# Altium PCB SIPM_small.pcbdoc
Units mm, origin at the board's own origin, x right, y up, seen from the top; angles counter-clockwise.
Board outline 44.07 x 56.52 mm, 2 copper layers (Top Layer, Bottom Layer); 5 components, 8 nets, 31 pads, 4 vias.
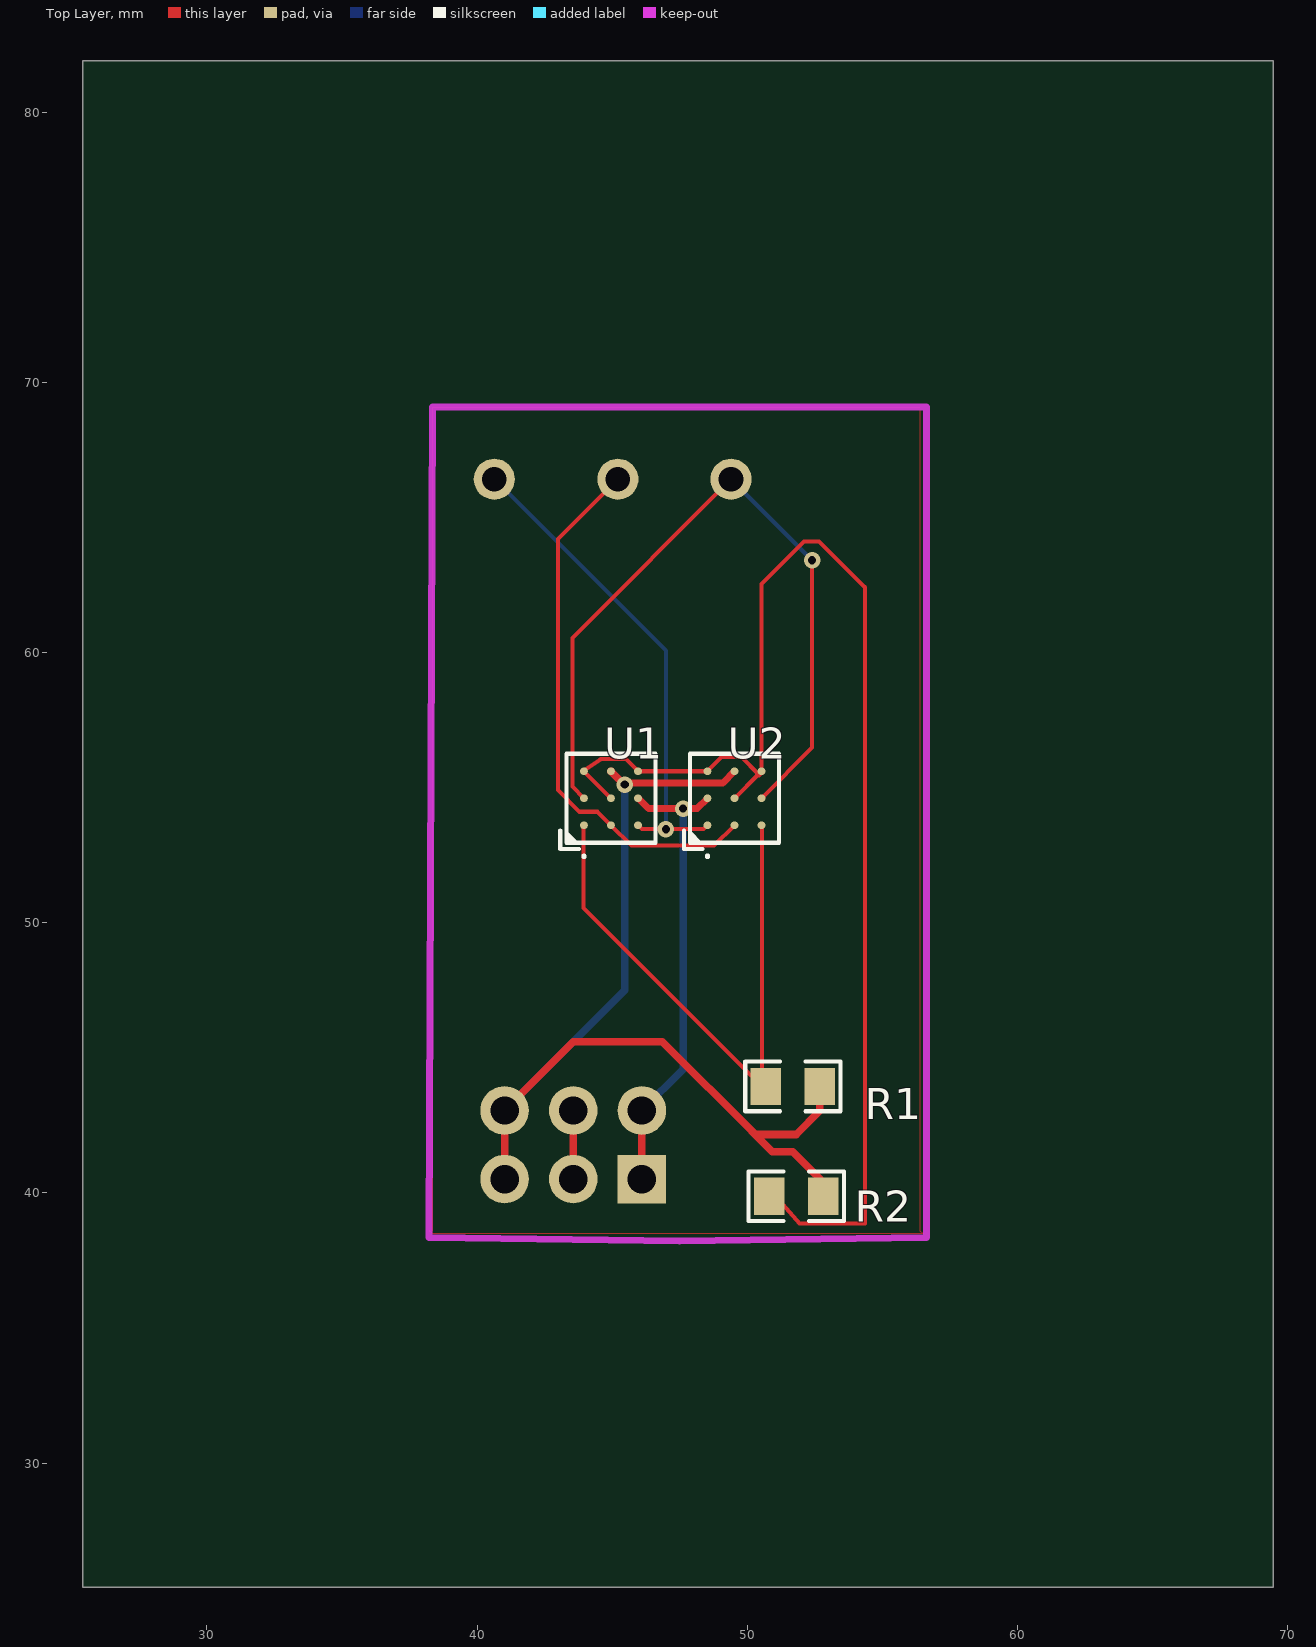
[diagram p0: Top Layer view]
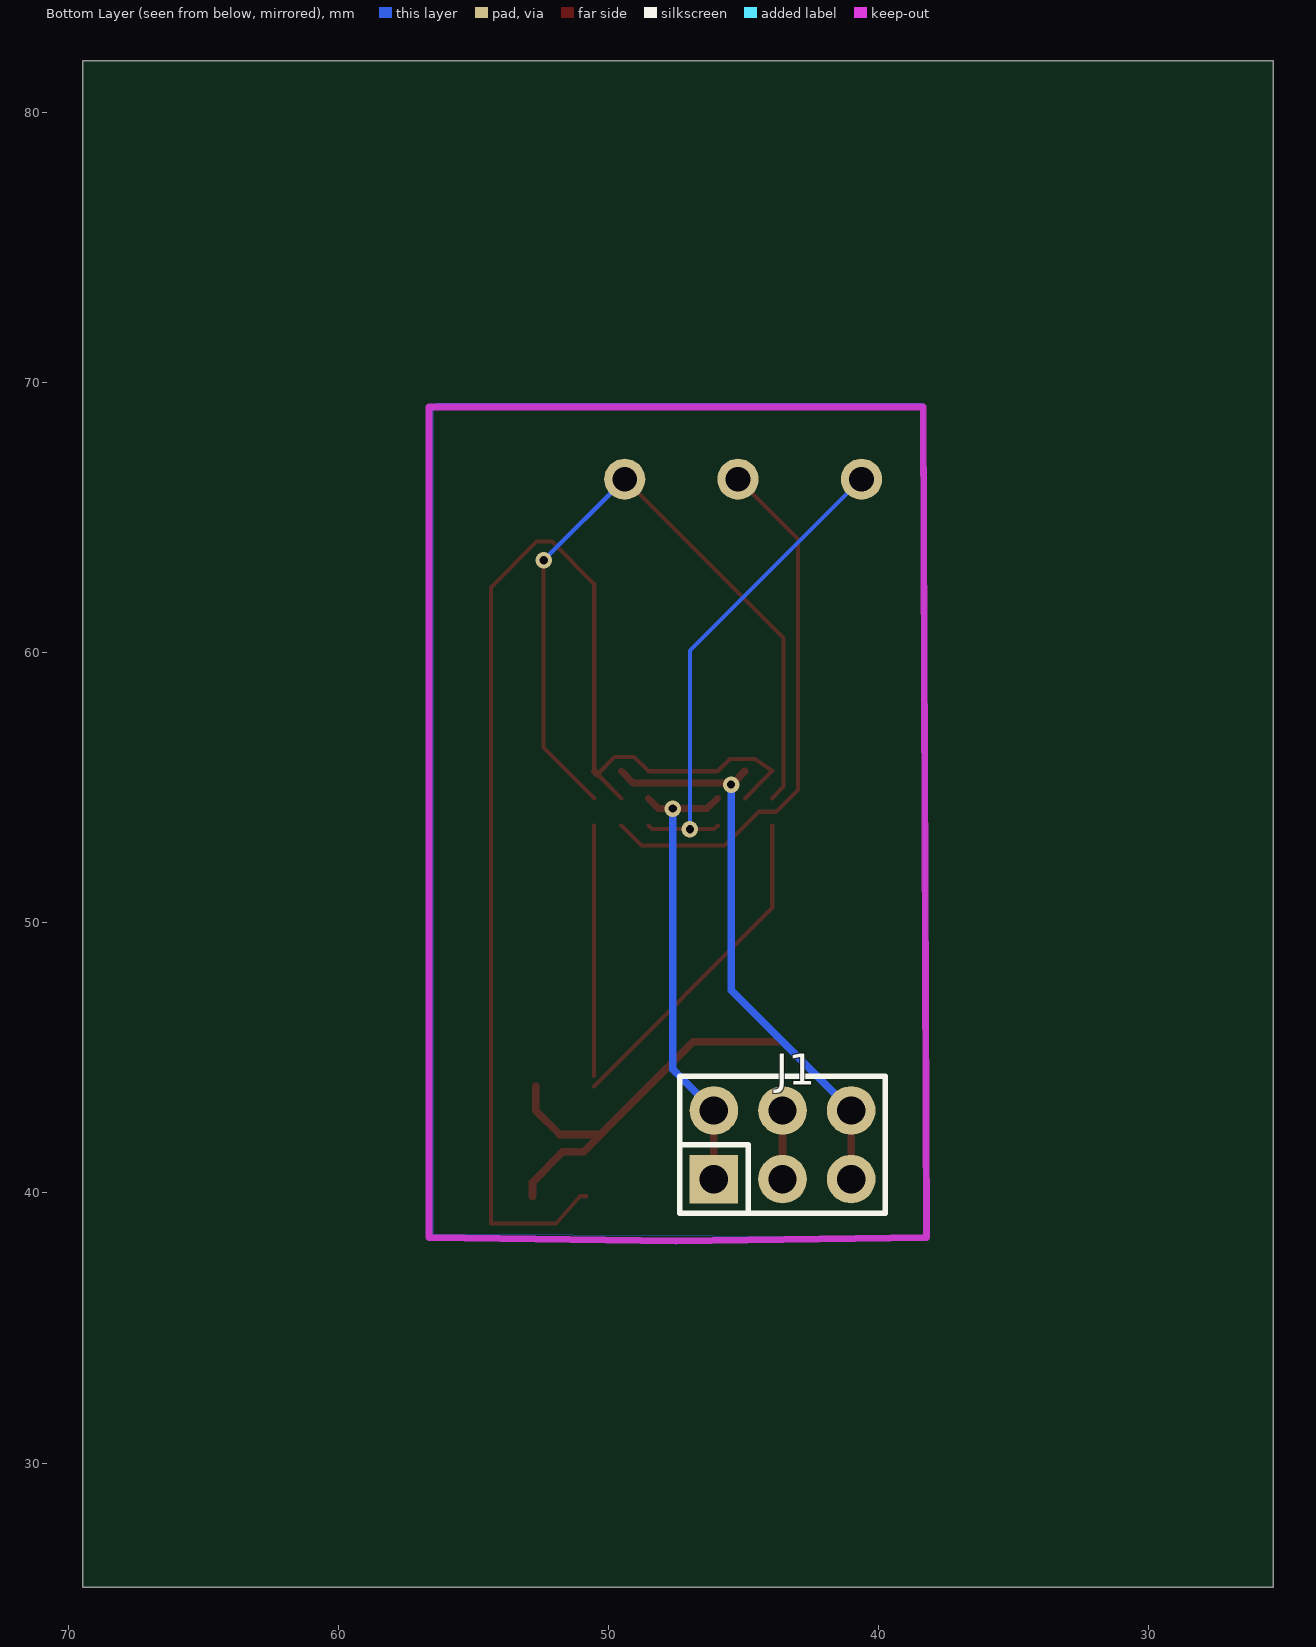
[diagram p1: Bottom Layer view, seen from below]

## Layer stack, top to bottom
Top Layer: signal copper (thickness not stored)
Dielectric: dielectric 0.32, FR-4, Dk 4.8
Bottom Layer: signal copper (thickness not stored)

## Board outline
69.469,25.4 25.4,25.4 25.4,81.915 69.469,81.915

## Components (designator, comment, footprint, x,y, rotation, side; value= is the part's Value field where it differs from the comment)
J1 "Header-Male-2.54_2x3" HDR-TH_6P-P2.54-V-M-R2-C3-S2.54-1 43.561,41.783 r0 bottom
R1 "0Ω" R0805 51.689,43.942 r0 top
R2 "0Ω" R0805 51.816,39.878 r0 top
U1 "NO" SIPM_ORI 44.958,54.61 r0 top
U2 "Sipm2" SIPM_REVERSE 49.53,54.61 r0 top

## Footprints (in the part's own frame and the unit in brackets; to place one, negate y for a bottom-side part, rotate by r counter-clockwise, add the part's x,y. Pads: shape width x height; smd on the part's side, far side on the other; paste and mask are expansions set on the pad)
HDR-TH_6P-P2.54-V-M-R2-C3-S2.54-1 [mm]
  rect 1.8x1.8 hole 1.05 paste+0 mask+0.051: 1(2.54,1.27)
  round 1.8 hole 1.05 paste+0 mask+0.051: 2(2.54,-1.27) 3(0,1.27) 4(0,-1.27) 5(-2.54,1.27) 6(-2.54,-1.27)
  silkscreen extent -3.81,-2.54 3.81,2.54
R0805 [mm]
  rect 1.133x1.377 smd paste-100 mask+0.051: 1(-1,0) 2(1,0)
  silkscreen extent -1.76,-0.92 1.76,0.92
SIPM_ORI [mm]
  round 0.288 smd paste-100 mask+0.051: A1(-1,0) A2(1,0) C1(0,1) C2(0,-1) R1(-1,-1) R2(1,-1) ""(-1,1) ""(0,0) ""(1,1)
  silkscreen extent -1.88,-2.2 1.65,1.65
SIPM_REVERSE [mm]
  round 0.288 smd paste-100 mask+0.051: A1(1,0) A2(-1,0) C1(0,1) C2(0,-1) R1(1,-1) R2(-1,-1) ""(-1,1) ""(0,0) ""(1,1)
  silkscreen extent -1.87,-2.2 1.65,1.65

## Free pads (board coordinates)
  round 1.524 hole 0.914 paste+0 mask+0.051: 8(40.64,66.421) 8(45.212,66.421) 8(49.403,66.421)

## Via types
v1: diameter 0.61, hole 0.305, Top Layer to Bottom Layer, tented both sides, 4 vias

## Nets (pads, with @x,y where several pads share a name; then routed paths per layer and width w, separated by ;. In a path a pad name is that pad's centre, name@x,y a point inside that pad or via, vN(x,y) a via of type N, cw(c..) or ccw(c..) an arc to the next point about the centre after c; other vN are vias at no path point)
A1: pad.8@49.403,66.421 U1.A1 U2.A1 | length 28.3
  Top Layer w0.15: U1.A1 43.528,55.04 43.528,60.546 pad.8@49.403,66.421 ; U2.A1 52.404,56.484 v1(52.404,63.42)
  Bottom Layer w0.16: pad.8@49.403,66.421 v1(52.404,63.42)
C2: pad.8@45.212,66.421 U1.C2 U2.C2 | length 20.1
  Top Layer w0.15: pad.8@45.212,66.421 42.993,64.202 42.993,54.913 43.796,54.11 44.458,54.11 U1.C2 45.711,52.857 48.777,52.857 U2.C2
GND: J1.3 J1.4 | length 2.5
  Top Layer w0.28: J1.3 J1.4
R1: R1.1 U1.R1 U2.R1 | length 21.7
  Top Layer w0.15: U1.R1@43.942,53.594 43.942,51.816 43.942,50.673 43.942,50.546 R1.1@50.546,43.942 ; R1.1@50.546,44.323 U2.R1@50.546,53.594
R2: pad.8@40.64,66.421 U1.R2 U2.R2 | length 18.3
  Top Layer w0.15: U1.R2 46.101,53.467 v1(46.99,53.467) 48.387,53.467 U2.R2
  Bottom Layer w0.15: pad.8@40.64,66.421 46.99,60.071 v1(46.99,53.467)
R3: R2.1 U1. U2. | length 49.8
  Top Layer w0.15: U1.@44.958,54.61 44.13,55.438 43.942,55.626 44.58,56.06 45.509,56.06 U1.@45.959,55.611 ; U1.@45.958,55.61 U2.@48.53,55.61 ; U2.@48.529,55.611 49.055,56.134 49.784,56.134 50.419,55.499 U2.@49.529,54.609 ; U2.@50.531,55.611 50.531,62.54 52.103,64.112 52.662,64.112 54.356,62.42 54.356,38.862 51.943,38.862 51.054,39.878 R2.1
  Top Layer w0.254: 50.42,55.5 U2.@50.53,55.61
SIPM_A: J1.5 J1.6 U1.A2 U2.A2 | length 17.2
  Top Layer w0.254: U1.A2@45.974,54.61 46.355,54.229 v1(47.625,54.229) 48.149,54.229 U2.A2
  Top Layer w0.28: 46.101,40.513 46.101,43.053
  Bottom Layer w0.28: 46.101,43.053 47.625,44.577 v1(47.625,54.229)
SIPM_C: J1.1 J1.2 R1.2 R2.2 U1.C1 U2.C1 | length 40.8
  Top Layer w0.254: v1@45.405,55.174 49.096,55.174 U2.C1 ; v1@45.405,55.175 45.462,55.118 v1(45.466,55.118)
  Top Layer w0.28: 41.021,40.513 41.021,43.053 43.561,45.593 46.863,45.593 50.292,42.164 51.816,42.164 52.69,43.04 R1.2 ; U1.C1 45.393,55.175 v1@45.405,55.175 ; 50.165,42.291 50.927,41.529 51.689,41.529 52.816,40.402 R2.2
  Bottom Layer w0.28: 41.021,43.053 45.466,47.498 v1(45.466,55.118)

## Polygon pours and split planes (outlines as drawn)
GND on Top Layer (solid): 38.354,69.088 56.388,69.088 56.388,38.608 56.515,38.481 38.354,38.481 38.227,38.608 38.354,38.608
GND on Bottom Layer (solid): 38.354,69.215 56.388,69.215 56.515,69.088 56.515,38.481 38.354,38.354 38.227,38.481